# EAGLE board ctrl_bottom_no_jck (EAGLE 8.5.0)
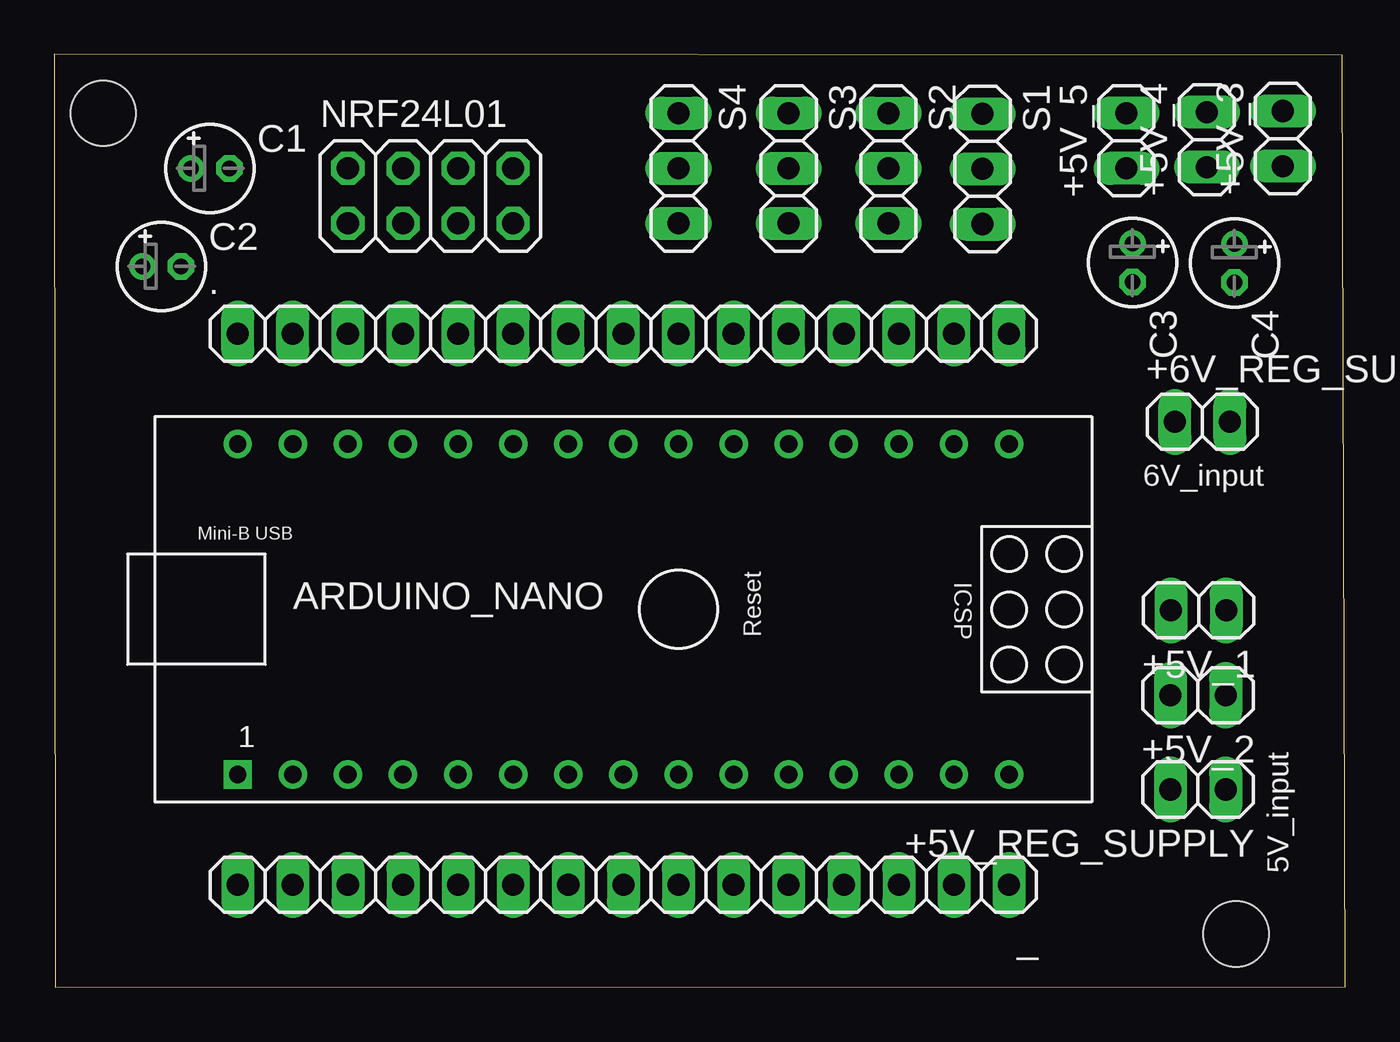
[diagram p0: board, top side]
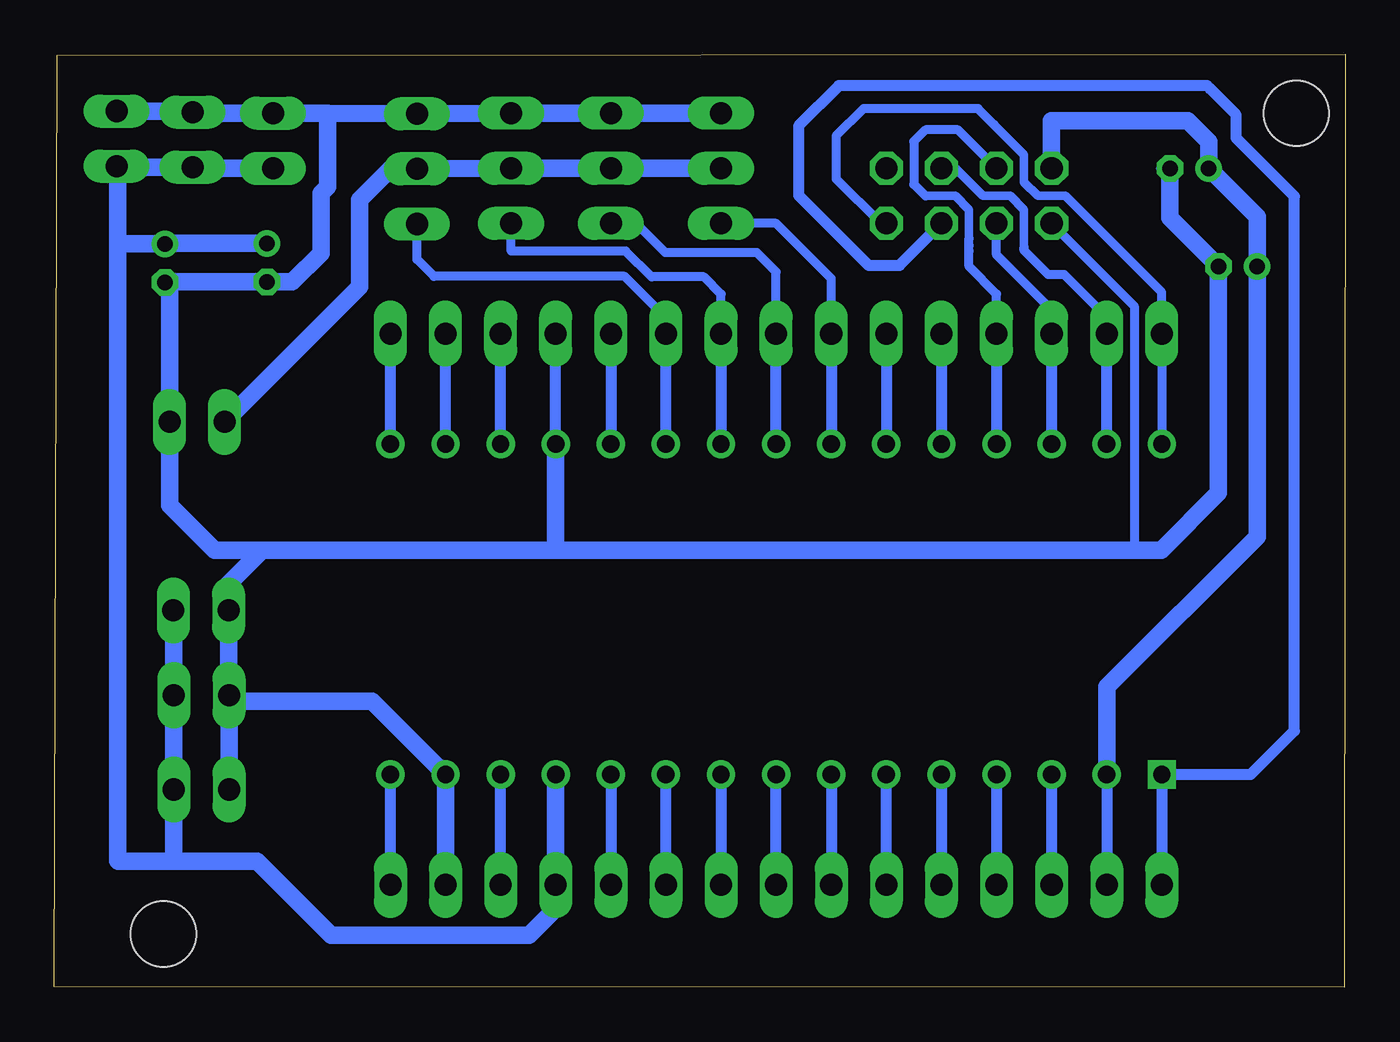
[diagram p1: board, bottom side, seen from below]

Size 59.52 x 43 mm. Coordinates in mm from the lower left corner, seen from the top.
Outline: 0.05,0 59.52,0.03 59.39,42.95 0,43 0.05,0
Copper layers (1*16): Top 0.035mm / dielectric 1.5mm / Bottom 0.035mm
Design rules "default *": minimum track width 6mil, minimum drill 0.35mm, track to track 6mil, track to pad 6mil, pad to pad 6mil, via to via 6mil, smd to smd 6mil, copper to edge 40mil, drill to drill 6mil, minimum pad ring 10mil, minimum via ring 8mil, stop-mask expansion 4mil, vias tented up to drill 0mil, thermal gap 10mil
Holes 3 mm at 54.48,2.46 2.26,40.28

## Footprints (pad centres in the part's own frame; a part is rotated, then mirrored left to right if it is on the bottom)
1X02 = drill 1.016 long: 1 -1.27,0; 2 1.27,0
1X15 = drill 1.016 long: 1 -17.78,0; 2 -15.24,0; 3 -12.7,0; 4 -10.16,0; 5 -7.62,0; 6 -5.08,0; 7 -2.54,0; 8 0,0; 9 2.54,0; 10 5.08,0; 11 7.62,0; 12 10.16,0; 13 12.7,0; 14 15.24,0; 15 17.78,0
ARDUINO_NANO = drill 0.8 square: 1 -20.32,-7.62 | drill 0.8: 2 -17.78,-7.62; 3 -15.24,-7.62; 4 -12.7,-7.62; 5 -10.16,-7.62; 6 -7.62,-7.62; 7 -5.08,-7.62; 8 -2.54,-7.62; 9 0,-7.62; 10 2.54,-7.62; 11 5.08,-7.62; 12 7.62,-7.62; 13 10.16,-7.62; 14 12.7,-7.62; 15 15.24,-7.62; 16 15.24,7.62; 17 12.7,7.62; 18 10.16,7.62; 19 7.62,7.62; 20 5.08,7.62; 21 2.54,7.62; 22 0,7.62; 23 -2.54,7.62; 24 -5.08,7.62; 25 -7.62,7.62; 26 -10.16,7.62; 27 -12.7,7.62; 28 -15.24,7.62; 29 -17.78,7.62; 30 -20.32,7.62
E1,8-4 = drill 0.711 pad 1.168: + -0.889,0 | drill 0.711 pad 1.168 octagon: - 0.889,0
2X04 = drill 1.016 octagon: 1 -3.81,-1.27; 2 -3.81,1.27; 3 -1.27,-1.27; 4 -1.27,1.27; 5 1.27,-1.27; 6 1.27,1.27; 7 3.81,-1.27; 8 3.81,1.27
1X03 = drill 1.016 long: 1 -2.54,0; 2 0,0; 3 2.54,0

## Placement (x,y rotation side)
+5V_1  [1X02]  52.76,17.37 180 top
+5V_2  [1X02]  52.73,13.46 180 top
+5V_3  [1X02]  56.64,39.12 90 top
+5V_4  [1X02]  53.14,39.07 90 top
+5V_5  [1X02]  49.43,39.01 90 top
+5V_REG_SUPPLY  [1X02]  52.73,9.12 180 top
+6V_REG_SUPPLY  [1X02]  52.93,26.06 0 top
.  [1X15]  26.24,30.12 0 top
_  [1X15]  26.24,4.72 180 top
ARDUINO_NANO  [ARDUINO_NANO]  28.78,17.42 0 top
C1  0.1uF  [E1,8-4]  7.19,37.74 0 top
C2  10uF  [E1,8-4]  4.95,33.22 0 top
C3  10uF  [E1,8-4]  49.71,33.4 270 top
C4  0.1uF  [E1,8-4]  54.41,33.38 270 top
NRF24L01  [2X04]  17.35,36.47 0 top
S1  [1X03]  42.8,37.72 270 top
S2  [1X03]  38.46,37.74 270 top
S3  [1X03]  33.86,37.74 270 top
S4  [1X03]  28.78,37.74 270 top

## Library data of the parts
+5V_1-+5V_5 +5V_REG_SUPPLY +6V_REG_SUPPLY . _ NRF24L01 S1-S4 = pinhead
ARDUINO_NANO = ArduinoNanoV30
C1-C4 = resistor

## Nets
+3V3: _.14 ARDUINO_NANO.2 C1.+ C2.+ NRF24L01.2
+6V: +6V_REG_SUPPLY.1 S1.2 S2.2 S3.2 S4.2
CE: ..3 ARDUINO_NANO.28 NRF24L01.3
CSN: ..4 ARDUINO_NANO.27 NRF24L01.4
GND: +5V_1.2 +5V_2.2 +5V_3.2 +5V_4.2 +5V_5.2 +5V_REG_SUPPLY.2 +6V_REG_SUPPLY.2 ..12 _.2 ARDUINO_NANO.14 ARDUINO_NANO.19 C1.- C2.- C3.- C4.- NRF24L01.1 S1.1 S2.1 S3.1 S4.1
IRQ: NRF24L01.8
MISO: ..1 ARDUINO_NANO.30 NRF24L01.7
MOSI: ..2 ARDUINO_NANO.29 NRF24L01.6
N$6: ..5 ARDUINO_NANO.26
N$12: ..11 ARDUINO_NANO.20
N$14: ..13 ARDUINO_NANO.18
N$15: ..14 ARDUINO_NANO.17
N$16: ..15 ARDUINO_NANO.16
N$17: _.1 ARDUINO_NANO.15
N$19: _.3 ARDUINO_NANO.13
N$21: _.5 ARDUINO_NANO.11
N$22: _.6 ARDUINO_NANO.10
N$23: _.7 ARDUINO_NANO.9
N$24: _.8 ARDUINO_NANO.8
N$25: _.9 ARDUINO_NANO.7
N$26: _.10 ARDUINO_NANO.6
N$27: _.11 ARDUINO_NANO.5
N$28: _.12 ARDUINO_NANO.4
N$29: _.13 ARDUINO_NANO.3
N$.: ..6 ARDUINO_NANO.25
SCK: _.15 ARDUINO_NANO.1 NRF24L01.5
SERVO1: ..10 ARDUINO_NANO.21 S1.3
SERVO2: ..9 ARDUINO_NANO.22 S2.3
SERVO3: ..8 ARDUINO_NANO.23 S3.3
SERVO4: ..7 ARDUINO_NANO.24 S4.3
VCC: +5V_1.1 +5V_2.1 +5V_3.1 +5V_4.1 +5V_5.1 +5V_REG_SUPPLY.1 _.4 ARDUINO_NANO.12 C3.+ C4.+

## Tracks (layer width: path | path; a pad name or v marks a point on that pad's centre or on a via)
+3V3
  Bottom 0.508: ARDUINO_NANO.2 _.14
  Bottom 0.813: ARDUINO_NANO.2 11,13.84 4.06,20.78 C2.+ 4.06,35.51 C1.+ 6.3,38.96 7.26,39.93 13.54,39.93 NRF24L01.2
+6V
  Bottom 0.813: S4.2 S3.2 S2.2 S1.2 43.71,37.73 44.01,37.73 45.44,36.3 45.44,32.28 +6V_REG_SUPPLY.1
CE
  Bottom 0.406: ..3 13.54,31.22 16.08,33.76 NRF24L01.3
  Bottom 0.508: ..3 ARDUINO_NANO.28
CSN
  Bottom 0.381: 19.36,36.47 17.98,36.47 17.35,35.84 17.35,34.52 17.35,34.19
  Bottom 0.406: 19.36,36.47 19.89,37.01 19.89,38.99 19.36,39.52 17.86,39.52 NRF24L01.4 | ..4 16.08,31.95 17.35,33.22 17.35,33.93 17.35,34.19 17.35,34.52
  Bottom 0.508: ..4 ARDUINO_NANO.27
GND
  Bottom 0.406: NRF24L01.1 9.73,31.39 9.73,20.19
  Bottom 0.508: ARDUINO_NANO.19 36.4,25.35 | 36.4,25.35 ..12 | 8.46,37.74 C1.- | 36.35,25.3 36.4,25.35 | +5V_4.2 53.19,40.39 | 9.73,20.19 9.68,20.14
  Bottom 0.813: S4.1 S3.1 S2.1 S1.1 46.91,40.28 | _.2 ARDUINO_NANO.14 44.86,13.19 51.18,13.19 +5V_2.2 | 46.91,40.28 47.5,40.28 +5V_5.2 53.09,40.28 53.19,40.39 +5V_3.2 | C1.- 8.08,35.46 C2.- 5.84,22.78 8.48,20.14 9.68,20.14 9.78,20.14 | 46.91,40.28 46.91,36.91 47.22,36.6 | 9.78,20.14 36.45,20.14 | 36.45,20.14 49.94,20.14 | 49.94,20.14 52.12,20.14 54.2,22.23 +6V_REG_SUPPLY.2 54.2,32.33 54.38,32.51 | 36.45,20.14 36.4,20.19 ARDUINO_NANO.19 | 9.73,20.19 9.78,20.14 | +5V_2.2 51.49,13.49 +5V_1.2 51.49,18.59 49.94,20.14 | +5V_2.2 +5V_REG_SUPPLY.2 | 54.38,32.51 C3.- 48.54,32.51 47.22,33.83 47.22,36.6 | 54.38,32.51 C4.- | 47.22,36.6
MISO
  Bottom 0.381: 16.19,39.76 14.81,38.38 14.81,37.11 14.17,36.47 12.9,36.47 8.46,32.03
  Bottom 0.406: ARDUINO_NANO.30 ..1 8.46,32.03 | NRF24L01.7 21.41,35.2 23.47,37.26 23.47,39.24 22.21,40.5 16.93,40.5 16.19,39.76
MOSI
  Bottom 0.381: NRF24L01.6 17.98,37.74 16.71,36.47 15.44,36.47 14.81,35.84 14.81,34.11
  Bottom 0.406: ..2 11,30.89 12.95,32.84 13.69,32.84 14.81,33.96 14.81,34.11
  Bottom 0.508: ARDUINO_NANO.29 ..2
N$6
  Bottom 0.508: ..5 ARDUINO_NANO.26
N$12
  Bottom 0.508: ..11 ARDUINO_NANO.20
N$14
  Bottom 0.508: ARDUINO_NANO.18 ..13
N$15
  Bottom 0.508: ARDUINO_NANO.17 ..14
N$16
  Bottom 0.508: ARDUINO_NANO.16 ..15
N$17
  Bottom 0.508: _.1 ARDUINO_NANO.15
N$19
  Bottom 0.508: _.3 ARDUINO_NANO.13
N$21
  Bottom 0.508: ARDUINO_NANO.11 _.5
N$22
  Bottom 0.508: _.6 ARDUINO_NANO.10
N$23
  Bottom 0.508: ARDUINO_NANO.9 _.7
N$24
  Bottom 0.508: _.8 ARDUINO_NANO.8
N$25
  Bottom 0.508: ARDUINO_NANO.7 _.9
N$26
  Bottom 0.508: _.10 ARDUINO_NANO.6
N$27
  Bottom 0.508: ARDUINO_NANO.5 _.11
N$28
  Bottom 0.508: ARDUINO_NANO.4 _.12
N$29
  Bottom 0.508: ARDUINO_NANO.3 _.13
N$.
  Bottom 0.508: ..6 ARDUINO_NANO.25
SCK
  Bottom 0.508: _.15 ARDUINO_NANO.1 4.37,9.8 2.35,11.82 2.35,36.46 5.03,39.14 5.03,40.21 6.22,41.4 6.38,41.55 23.34,41.55 25.2,39.7 25.2,36.5 21.97,33.27 20.55,33.27 NRF24L01.5
SERVO1
  Bottom 0.406: S1.3 42.8,33.55 42.01,32.77 33.22,32.77 31.32,30.86 ..10
  Bottom 0.508: ARDUINO_NANO.21 ..10
SERVO2
  Bottom 0.406: S2.3 38.46,33.93 33.17,33.93 31.98,32.74 29.57,32.74 28.78,31.95 ..9
  Bottom 0.508: ..9 ARDUINO_NANO.22
SERVO3
  Bottom 0.406: S3.3 32.69,35.2 31.34,33.86 27.13,33.86 26.24,32.97 ..8
  Bottom 0.508: ARDUINO_NANO.23 ..8
SERVO4
  Bottom 0.406: S4.3 26.24,35.2 23.7,32.66 ..7
  Bottom 0.508: ..7 ARDUINO_NANO.24
VCC
  Bottom 0.508: 53.09,37.74 +5V_4.1 | 56.59,37.8 +5V_3.1 | _.4 36.4,3.63 | 54.38,34.29 C4.+
  Bottom 0.813: +5V_5.1 53.09,37.74 | +5V_4.1 56.59,37.8 56.59,34.29 | 36.4,3.63 37.62,2.41 46.76,2.41 50.17,5.82 53.92,5.82 | C3.+ 54.38,34.29 | 53.92,5.82 56.57,5.82 56.59,5.84 56.59,34.29 | 53.92,5.82 54,5.89 +5V_REG_SUPPLY.1 +5V_2.1 54,17.35 +5V_1.1 | C4.+ 56.57,34.26 56.59,34.29 | ARDUINO_NANO.12 _.4

## Text on the board
tNames: 6V_input | 5V_input